# EAGLE board LEDBox (EAGLE 9.1.3)
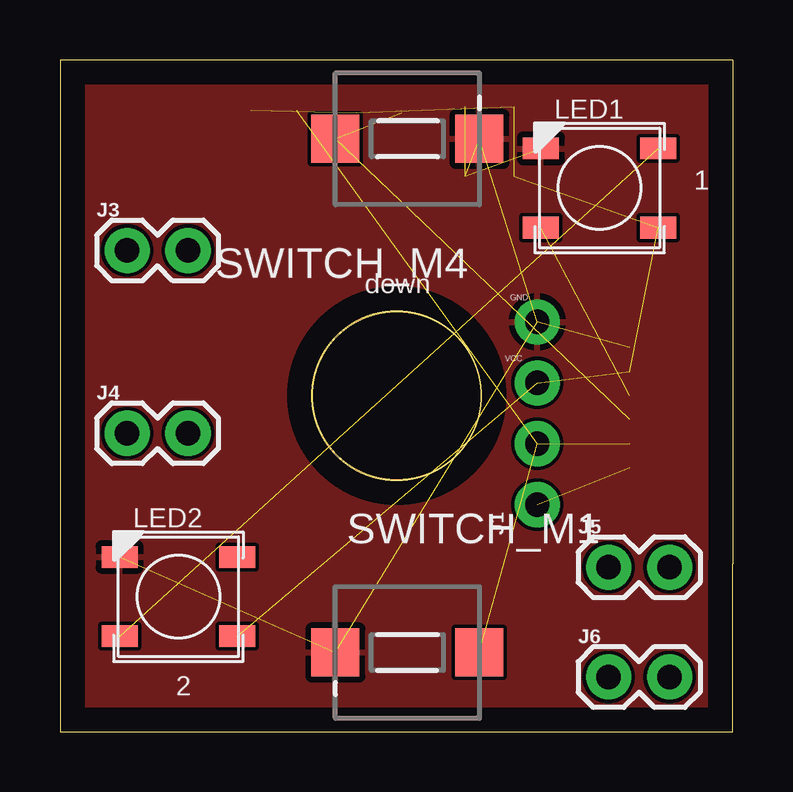
[diagram p0: board, top side]
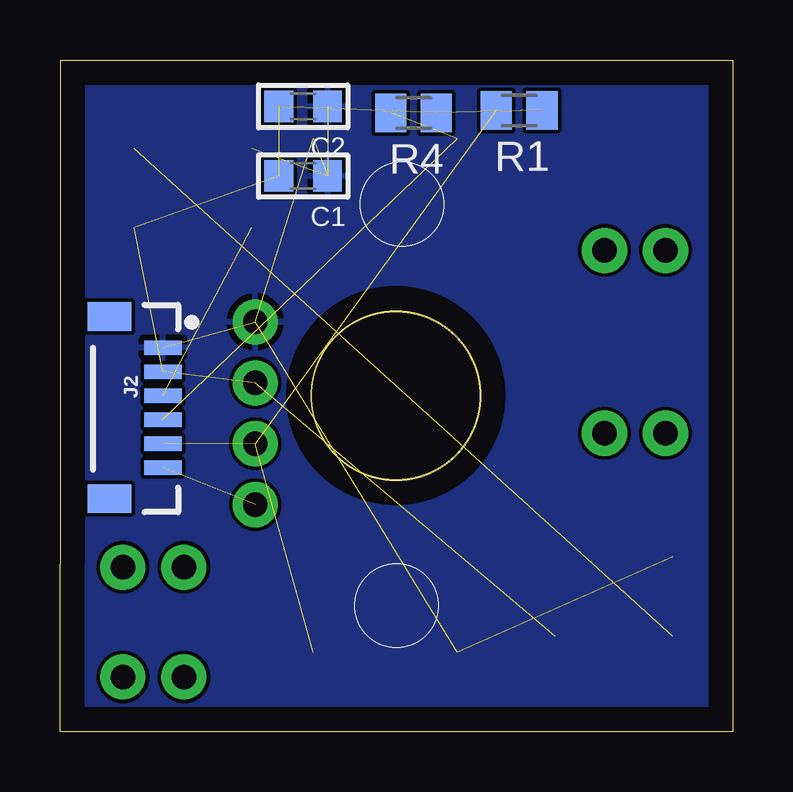
[diagram p1: board, bottom side, seen from below]

Size 28.02 x 28.01 mm. Coordinates in mm from the lower left corner, seen from the top.
Outline: 28.02,28.01 28.02,7.01 28.02,0 0,0 0,28.01 28.02,28.01
Outline: circle at 14.03,14.01 radius 3.5
Outline: circle at 14.03,14.01 radius 3.5
Outline: circle at 14.03,14.01 radius 3.5
Outline: circle at 14.03,14.01 radius 3.54
Copper layers (1*16): Top 0.035mm / dielectric 1.5mm / Bottom 0.035mm
Design rules "default": minimum track width 6mil, minimum drill 0.35mm, track to track 6mil, track to pad 6mil, pad to pad 6mil, via to via 6mil, smd to smd 6mil, copper to edge 40mil, drill to drill 6mil, minimum pad ring 10mil, minimum via ring 8mil, stop-mask expansion 4mil, vias tented up to drill 0mil, thermal gap 10mil
Net classes: 0 default: width 0.2 mm

## Footprints (pad centres in the part's own frame; a part is rotated, then mirrored left to right if it is on the bottom)
C0805 = smd 1.2 x 1.3: 1 -1.016,0; 2 1.016,0
1X04_NO_SILK = drill 1.016 pad 1.88: 1 0,0; 2 2.54,0; 3 5.08,0; 4 7.62,0
1X06-1MM = smd 0.6 x 1.55: 1 -2.54,1.27; 2 -1.54,1.27; 3 -0.54,1.27; 4 0.46,1.27; 5 1.46,1.27; 6 2.46,1.27 | smd 1.2 x 1.8: P$1 -3.84,-0.955; P$2 3.76,-0.955
1X02 = drill 1.016 pad 1.88: 1 0,0; 2 2.54,0
LED5050 = smd 1.5 x 0.9: 1-VDD 2.45,-1.65; 2-DOUT 2.45,1.65; 3-GND -2.45,1.65; 4-DIN -2.45,-1.65
M0805 = smd 1.3 x 1.6: 1 -0.95,0; 2 0.95,0
DTSM-3 = smd 2 x 2: 1 -3,0; 2 3,0

## Placement (x,y rotation side)
C1  0.1uf  [C0805]  17.89,23.17 180 bottom
C2  0.1uf  [C0805]  17.89,26.07 180 bottom
J1  [1X04_NO_SILK]  19.89,9.47 90 top
J2  [1X06-1MM]  25,13.48 270 bottom
J3  [1X02]  2.79,20.07 0 top
J4  [1X02]  2.79,12.45 0 top
J5  [1X02]  22.86,6.86 0 top
J6  [1X02]  22.86,2.29 0 top
LED1  [LED5050]  22.49,22.67 0 top
LED2  [LED5050]  4.93,5.63 0 top
R1  10K  [M0805]  8.89,25.91 180 bottom
R4  10K  [M0805]  13.29,25.81 180 bottom
SWITCH_M1  DTSM-3  [DTSM-3]  14.48,3.3 0 top
SWITCH_M4  DTSM-3  [DTSM-3]  14.48,24.72 180 top

## Library data of the parts
C1 C2 = rc-master-smd
J1 = SparkFun-Connectors; PROD_ID: CONN-09696
J2 = SparkFun-Connectors; PROD_ID: CONN-08249; SF_ID: GPS-00579
J3-J6 = SparkFun-Connectors
LED1 LED2 = SK6812
R1 R4 = resistor
SWITCH_M1 SWITCH_M4 = switch-tact

## Nets
DIO_IN: J1.1 J2.6
GND: C1.1 C2.1 J1.4 J2.1 LED1.3-GND LED2.3-GND SWITCH_M1.1 SWITCH_M4.1
N$1: LED1.2-DOUT LED2.4-DIN
N$2: LED2.2-DOUT
NEO_IN: J2.3 LED1.4-DIN
SWD_IN: J2.4 R4.2 SWITCH_M4.2
SWU_IN: J1.2 J2.5 R1.2 SWITCH_M1.2
VCC: C1.2 C2.2 J1.3 J2.2 LED1.1-VDD LED2.1-VDD R1.1 R4.1

## Tracks (layer width: path | path; a pad name or v marks a point on that pad's centre or on a via)
DIO_IN  (1 unrouted)
GND  (7 unrouted)
  pour Top: -1.02,29.97 29.46,29.97 29.46,-2.03 -1.02,-2.03
  pour Bottom: -1.27,30.73 30.73,30.73 30.73,-3.81 -1.27,-3.81
N$1  (1 unrouted)
NEO_IN  (1 unrouted)
SWD_IN  (2 unrouted)
SWU_IN  (3 unrouted)
VCC  (7 unrouted)

## Text on the board
tPlace: 1 | down | GND | VCC | 2